# Altium PCB LiPoBattery.PcbDoc
Units mil, origin at the board's own origin, x right, y up, seen from the top; angles counter-clockwise.
Board outline 2340 x 2480 mil, 2 copper layers (Top Layer, Bottom Layer); 22 components, 10 nets, 59 pads, 11 vias.
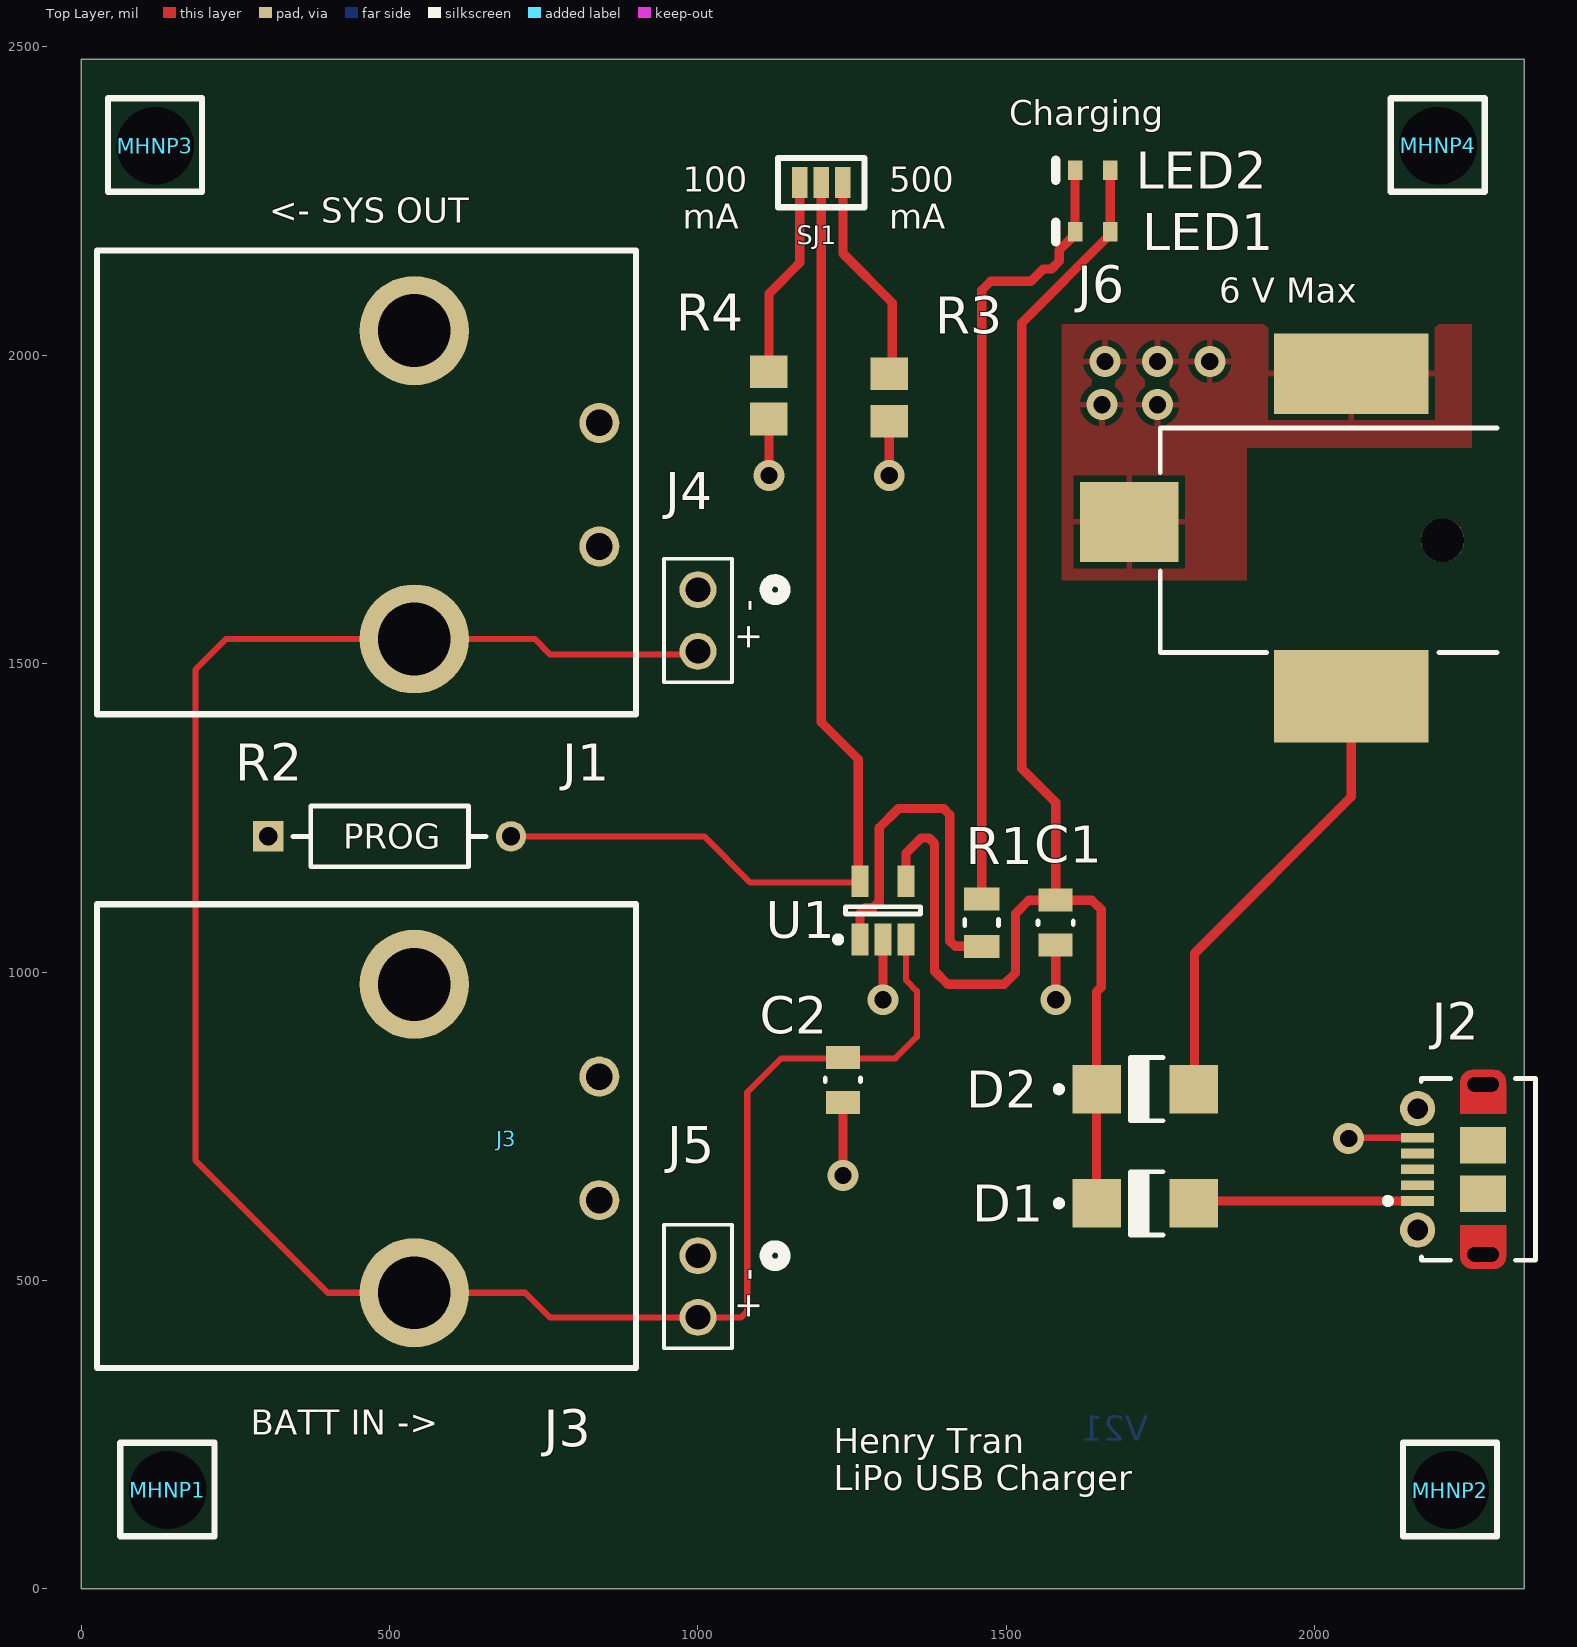
[diagram p0: Top Layer view]
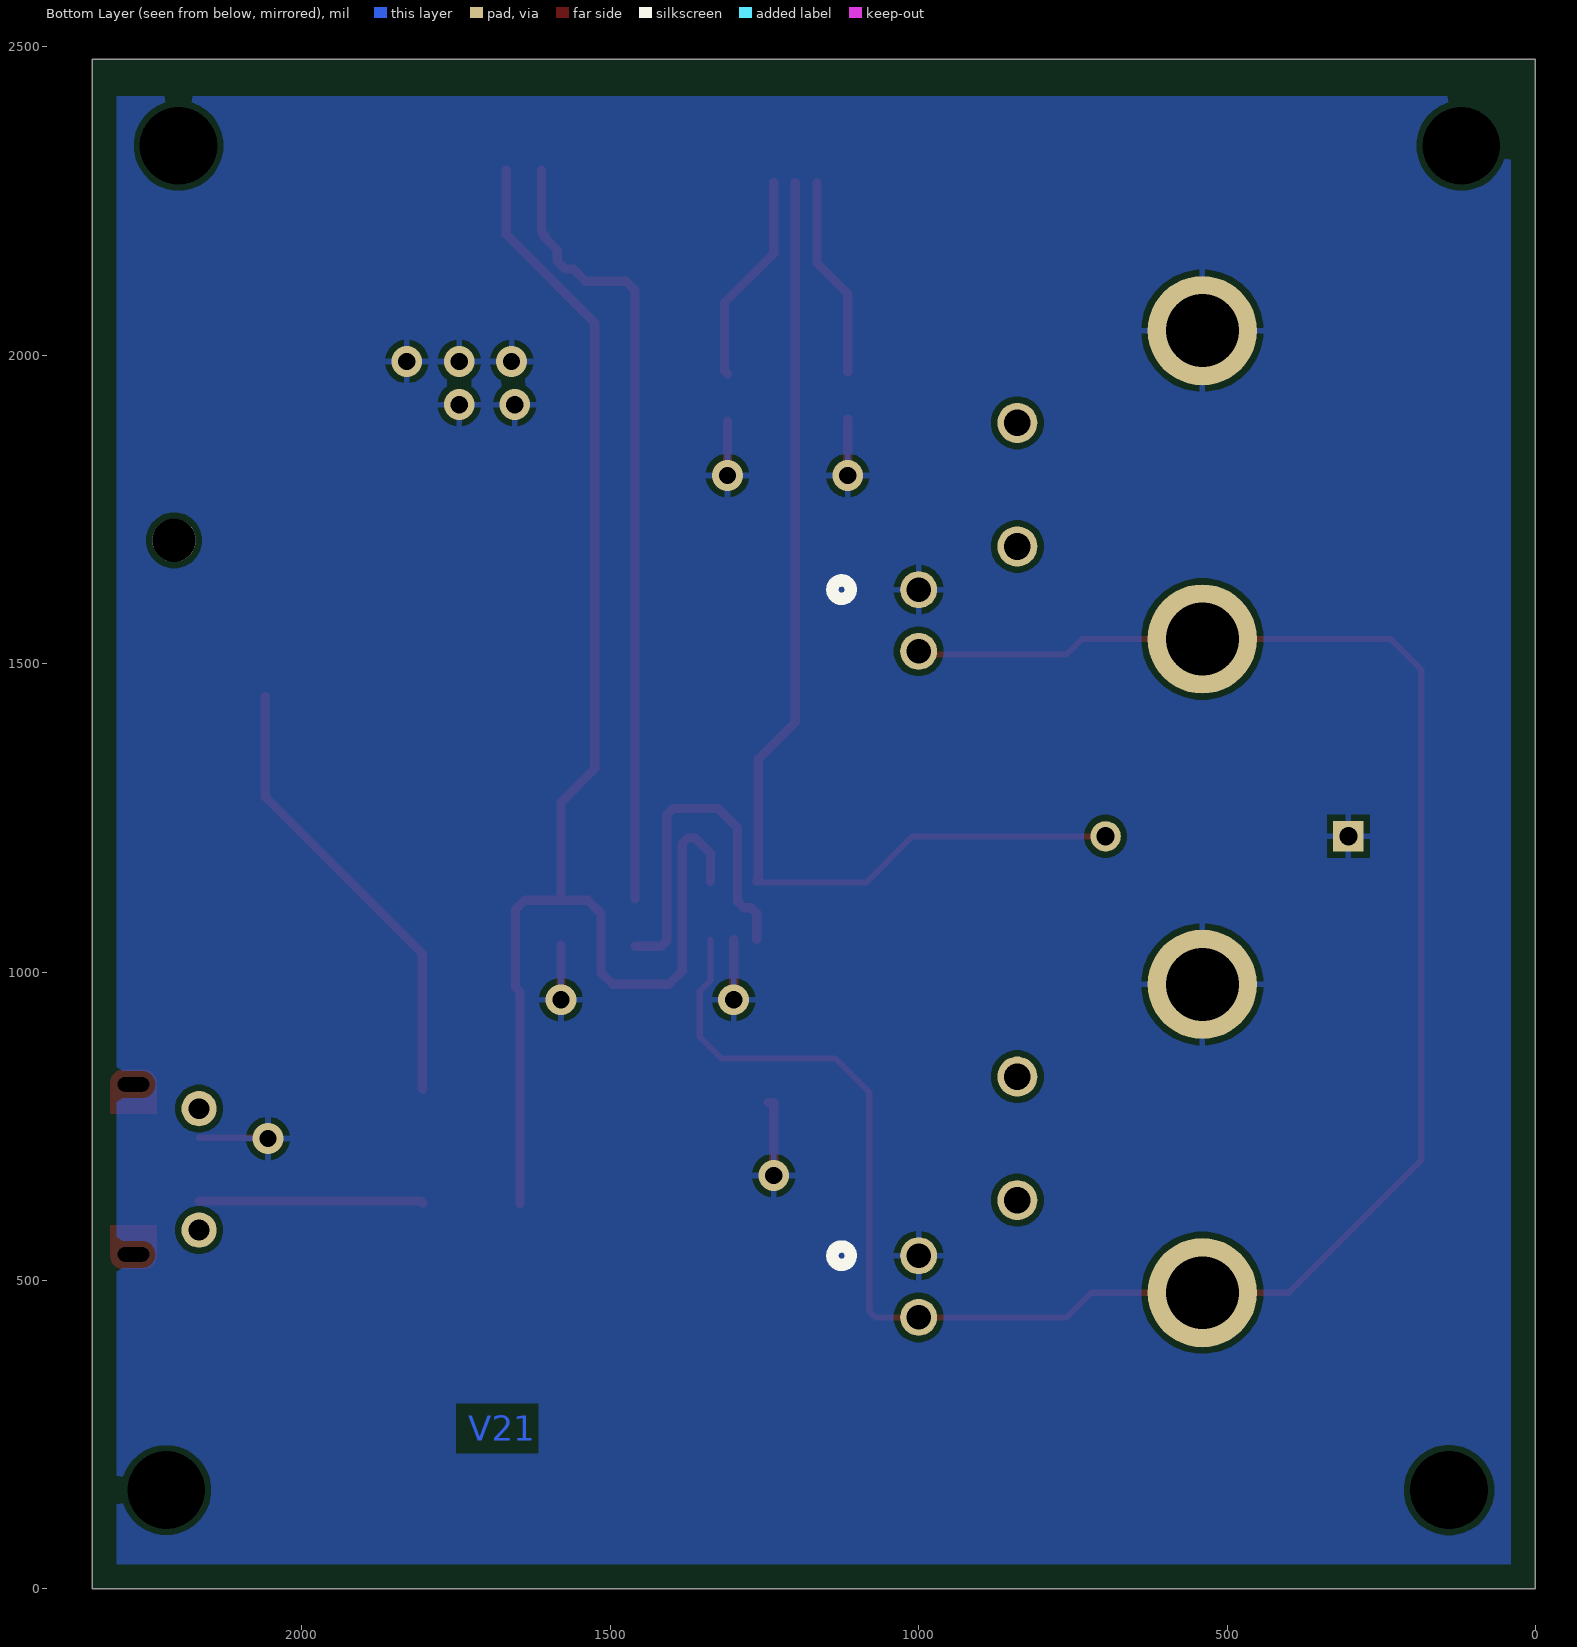
[diagram p1: Bottom Layer view, seen from below]

## Layer stack, top to bottom
Top Solder: solder mask 0.4, Solder Resist, Dk 3.5
Top Layer: signal copper 1.4
Dielectric 1: dielectric 12.6, FR-4, Dk 4.8
Bottom Layer: signal copper 1.4
Bottom Solder: solder mask 0.4, Solder Resist, Dk 3.5

## Board outline
0,740 0,2480 2340,2480 2340,0 0,0

## Design rules (kind name [scope] priority, off if disabled: settings)
Clearance [All] p1: gap=10 ignorepadtopadclearanceinfootprint=TRUE
PolygonConnect [All] p1: connectstyle=Relief reliefconductorwidth=10 reliefentries=4 polygonreliefangle="90 Angle" airgapwidth=10
RoutingVias [All] p1: holewidth=28 width=50 viastyle="Through Hole" minholewidth=28 minwidth=50 maxholewidth=28 maxwidth=50
SolderMaskExpansion [All] p1: expansion=4 istentingtop=FALSE
SupplyNets "Schematic Supply Nets" [InNet('GND')] p1: voltage=0.000
Width [All] p1: maxlimit=40 minlimit=10 preferedwidth=10
30 further rules are at their usual default settings.

## Components (designator, comment, footprint, x,y, rotation, side; value= is the part's Value field where it differs from the comment)
C1 "4.7uF" FP-CC0805-0_85-MFG 1580,1080 r270 top value="4.7 uF"
C2 "4.7uF" FP-CC0805-0_85-MFG 1235,825 r270 top value="4.7 uF"
D1 "40V, 1A" ONSC-SMA-2-403D-02_V 1725,625 r0 top
D2 "40V, 1A" ONSC-SMA-2-403D-02_V 1725,810 r0 top
J1 "CONN HEADER R/A 2POS 5.08MM" 1-179276-2 540,2040 r270 top locked
J2 "105017-0001" USB-MICRO-B_V 2220,680 r90 top locked
J3 "CONN HEADER R/A 2POS 5.08MM" 1-179276-2 540,980 r270 top locked
J4 "2 POS VERT HEADER  0.100\"" 2Pins_AMP 1000,1620 r180 top
J5 "2 POS VERT HEADER  0.100\"" 2Pins_AMP 1000,540 r180 top
J6 "CONN PWR JACK 2.1X5.5MM SOLDER" FP-RASM722PTR13X-MFG 2040,1700 r90 top locked
LED1 "RED" VISH-TLMS1000_V 1640,2200 r180 top
LED2 "RED" VISH-TLMS1000_V 1640,2300 r180 top
MHNP1 "Mounting Hole Non-Plated 3.2mm" MTHNP3P2MM 140,160 r90 top
MHNP2 "Mounting Hole Non-Plated 3.2mm" MTHNP3P2MM 2220,160 r90 top
MHNP3 "Mounting Hole Non-Plated 3.2mm" MTHNP3P2MM 120,2340 r90 top
MHNP4 "Mounting Hole Non-Plated 3.2mm" MTHNP3P2MM 2200,2340 r90 top
R1 "330" FP-CRCW0805-e3-MFG 1460,1080 r270 top
R2 "PROG" FP-MRS25-MFG 500,1220 r0 top
R3 "2k" RESC2013X70X40ML20T20 1310,1931.61 r90 top
R4 "10k" RESC2013X70X40ML20T20 1115,1935 r90 top
SJ1 "SJUMPER3POS" SJUMPER3POS-Footprint-1 1200,2280 r180 top (schematic designator SJ?)
U1 "Charge Management Controller" SOT-23-OT5_M 1300,1100 r90 top

## Footprints (in the part's own frame and the unit in brackets; to place one, negate y for a bottom-side part, rotate by r counter-clockwise, add the part's x,y. Pads: shape width x height; smd on the part's side, far side on the other; paste and mask are expansions set on the pad)
1-179276-2 [mm] "2_POS_HDR_X19MMY22MM"
  round 4.5 hole 3: 1(0,0) 2(12.7,0)
  round 1.65 hole 1.1: 3(8.89,7.62) 4(3.8,7.62)
  silkscreen extent -3.3,-13.08 15.8,9.13, body extent -3.24,-13.65 15.84,8.45, height 10.86
2Pins_AMP [mil]
  round 60 hole 40 paste-99999 mask+0: 1(0,0) 2(0,100)
  silkscreen extent -140,-50 55,150
FP-CC0805-0_85-MFG [mm]
  rect 0.95x1.4 smd paste+0 mask+0: 1(-0.925,0) 2(0.925,0)
  silkscreen extent -0.08,-0.72 0.08,0.72, body extent -1.6,-1.05 1.6,1.05, height 0.25
FP-CRCW0805-e3-MFG [mm]
  rect 0.95x1.45 smd paste+0 mask+0: 1(-0.975,0) 2(0.975,0)
  silkscreen extent -0.13,-0.7 0.13,0.7, body extent -1.55,-0.82 1.55,0.82, height 0.25
FP-MRS25-MFG [mm]
  rect 1.25x1.25 hole 0.75 paste-2539.97 mask+0: 1(-5,0)
  round 1.25 hole 0.75 paste-2539.97 mask+0: 2(5,0)
  silkscreen extent -3.98,-1.25 3.98,1.25, body extent -5.72,-1.35 5.72,1.35, height 0.25
FP-RASM722PTR13X-MFG [mm]
  rect 3.3x4.06 smd paste+0 mask+0: 1(0.76,8.65)
  rect 3.81x6.35 smd paste+0 mask+0: 2(-6.43,-0.49)
  rect 3.3x6.35 smd paste+0 mask+0: 3(6.86,-0.49)
  round 1.78 hole 1.78 unplated paste-2539.97 mask+0: ""(0,-4.25)
  silkscreen extent -4.63,-6.5 4.63,7.38, body extent -8.43,-7.48 8.61,10.78, height 0.25
MTHNP3P2MM [mm] "Mouting Hole Non-Plated, 3.2 mm hole"
  round 1 hole 3.2: ""(0,0)
  silkscreen extent -1.9,-1.92 1.95,1.95
ONSC-SMA-2-403D-02_V [mm] "Molded, 2-Leads, Body 4.57x2.92mm"
  rect 2x2 smd: 1(-2,0) 2(2,0)
  silkscreen extent -3.67,-1.3 0.74,1.3, body extent -2.16,-1.3 2.16,1.3, height 2.2
RESC2013X70X40ML20T20 [mm] "Chip Resistor, 2-Leads, Body 2.00x1.25mm, IPC Low Density"
  rect 1.35x1.55 smd: 1(-0.975,0) 2(0.975,0)
  body extent -1.1,-0.72 1.1,0.72, height 0.7
SJUMPER3POS-Footprint-1 [mil]
  rect 25x50 smd: 1(-35,0) 2(0,0) 3(35,0)
  silkscreen extent -70,-40 70,40
SOT-23-OT5_M [mm] "SOT23, 5-Leads, Body 2.9x1.7mm, Pitch 0.95mm, Lead Span 2.8mm, IPC Low Density"
  rect 1.3x0.7 smd: 1(-1.2,0.95) 2(-1.2,0) 3(-1.2,-0.95) 4(1.2,-0.95) 5(1.2,0.95)
  silkscreen extent -1.32,-1.55 0.15,1.97, body extent -0.9,-1.55 0.9,1.55, height 1.45
USB-MICRO-B_V [mm] "USB, MICRO B, Body 7.491x4.695 mm, Pitch 0.65 mm"
  rect 0.4x1.35 smd: 1(-1.3,1.35) 2(-0.65,1.35) 3(0,1.35) 4(0.65,1.35) 5(1.3,1.35)
  round 1.45 hole 0.85: 6(-2.5,1.35) 7(2.5,1.35)
  rrect50% 0x0 hole 0.6 slot 1.3 at 90 deg: 8(-3.5,-1.35) 11(3.5,-1.35)
  rect 1.5x1.9 smd: 9(-1,-1.35) 10(1,-1.35)
  Top Layer circle w0.5: c-3.6,-1.8 r0.25
  Top Layer circle w0.5: c-3.6,-0.9 r0.25
  Top Layer circle w0.5: c3.6,-1.8 r0.25
  Top Layer circle w0.5: c3.6,-0.9 r0.25
  Top Layer region: -3.6,-1.8 -3.6,-0.9 -4.1,-0.9 -4.1,-1.8
  Top Layer region: 3.6,-0.9 3.6,-1.8 4.1,-1.8 4.1,-0.9
  Top Layer region: 2.3,-0.4 2.3,-2.3 3.6,-2.3 3.6,-0.4
  Top Layer region: -2.3,-2.3 -2.3,-0.4 -3.6,-0.4 -3.6,-2.3
  silkscreen extent -3.75,-3.5 3.75,2.7, body extent -4.1,-3.9 4.1,1.5, height 2.67
VISH-TLMS1000_V [mm] "SMD, 2-Leads, Body 0.8x1.6mm"
  rect 0.6x0.8 smd: 1(-0.725,0) 2(0.725,0)
  silkscreen extent 1.52,-0.4 1.52,0.4, body extent -0.8,-0.4 0.8,0.4, height 0.65

## Part data
C1 C2: library part CMP-03422-001352-1, "CAP CER 4.7UF 6.3V X5R 0805", Capacitance="4.7 uF", Manufacturer=Yageo, Manufacturer Part Number=CC0805KRX5R5BB475, Package=CC0805-0.85, Temperature="-30°C to +85°C", Temperature Characteristic=X5R, Temperature Range High=+85°C, Temperature Range Low=-30°C, Tolerance=0.1, Voltage Rating="6.3 V", Automotive=No, Category=Cap, ComponentLink2Description=Datasheet, ComponentLink2URL=http://www.yageo.com/documents/recent/UPY-GPHC_Y5V_6.3V-to-50V_8.pdf, Device Class L1="Passive Components", Device Class L2=Capacitors, Device Class L3="Ceramic Capacitors", Digikey Description="CAP CER 4.7UF 6.3V X5R 0805", Footprint Url=http://www.yageo.com/exep/pages/download/literatures/UPY-C_GEN_24.pdf, Height=0.95mm, Ipc Land Pattern Name=CAPC200125X85, Lead Free=Yes, Material=Ceramic, Mouser Description="Multilayer Ceramic Capacitors MLCC - SMD/SMT 4.7uF 6.3V X5R 10%", Octopart=https://octopart.com/cc0805krx5r5bb475-yageo-12885121, RoHS=TRUE
D1 D2: library part CMP-1055-00320-1, "Schottky Power Rectifier, 2-Pin SMA, Pb-Free, Tape and Reel", Manufacturer="On Semiconductor", PartNumber=MBRA140T3G, ComponentLink1Description="Manufacturer URL", ComponentLink1URL=http://www.onsemi.com/, ComponentLink2Description=Datasheet, ComponentLink2URL=http://www.onsemi.cn/pub_link/Collateral/MBRA140T3-D.PDF, ComponentLink3Description="Package Specification", ComponentLink3URL=http://www.onsemi.com/pub_link/Collateral/403D-02.PDF, Configuration=Single, DatasheetVersion="Rev. 10", IFSM Max (A)=30, Mounting Technology="Surface Mount", PackageDescription="2-Pin Small Molded Package, J-Bend Lead, Body 2.605 x 4.315 mm", PackageReference=SMA-2-403D-02, PackageVersion="Rev. G, 07/2012", Packing="Tape and Reel", RoHS=TRUE
J1 J3: library part 1-179276-2, "Connector Header Through Hole, Right Angle 2 position 0.200\" (5.08mm)", Manufacturer="TE Connectivity AMP Connectors", Supplier Part Number 1=A29545-ND, ComponentLink1Description="Product URL", ComponentLink1URL=https://www.te.com/en/product-1-179276-2.html, Manufacturer Part Number=1-179276-2, Supplier 1=Digikey
J2: library part CMP-2000-05827-1, "Micro-USB B Receptacle, Right Angle, Bottom Mount, Surface Mount, with Solder Tabs, -30 to 85 degC, 5-Pin USB, RoHS, Tape and Reel", Manufacturer=Molex, Package Description="5-Leads USB, Micro B, Body 7.5 x 5 mm, Pitch 0.65 mm", Package Reference=MICRO-B, Package Version="Rev. F, 12/2012", Standard Package=1, Voltage - Max=30V, 3D Model=105017-0001.stp, Catalog Drawings=1050170001, Category=Connectors,Interconnects, Circuits=5, Connector Type=USB-microB, Datasheet URL=http://www.molex.com/elqNow/elqRedir.htm?ref=http://www.molex.com/webdocs/datasheets/pdf/en-us/1050170001_IO_CONNECTORS.pdf, Datasheet Version=03/2016, Family=USB,DVI,HDMIConnectors, Featured Product=Micro-USBConnectorsUSBConnectors, Features=Shielded,SolderRetention, Gender=Receptacle, Ingress Protection=-, Manufacturer URL=http://www.molex.com/, Mating Products=WM17145-ND-CABLEMICROUSBBTOSTDA1.0MWM17147-ND-CABLEMICROUSBBTOSTDA2.0MWM17146-ND-CABLEMICROUSBBTOSTDA1.5M, Mounting Technology=SurfaceMount, Mounting Type=BoardCutout,SurfaceMount,RightAngle, Number of Contacts=5, Online Catalog=Molex-MicroUSB, Other Names=WM1399DKR, Package URL=http://www.molex.com/pdm_docs/sd/1050170001_sd.pdf, Packaging=Digi-Reel®, PCN Assembly/Origin=ResinSupplier21/Oct/2015, RoHS Information=1050170001CertofCompliance, Series=-, Specifications=-
J4 J5: library part 67997-402HLF, "Connector Header Through Hole 2 position", Mfr_Name="Amphenol ICC", RefDes=RefDes, Supplier 1="Arrow Electronics", Supplier Part Number 1=67997-402HLF, Type=Type
J6: library part CMP-47995-000002-1, Case/Package=SMD/SMT, Color=Black, Current Rating=5A, Package Quantity=120, Connector Type=Jack, Contact Material="Copper Alloy", Contact Plating=Tin, Gender=Male, Housing Color=Black, Housing Material=Thermoplastic, Mount="Surface Mount", Shielding=Unshielded, Termination=Solder
LED1 LED2: library part CMP-2000-07254-1, "Low Current LED, 40 mW, 1.8 V, -40 to 100 degC, 2-Pin SMD (0603), RoHS, Tape and Reel", Forward Current If=2mA, Forward Voltage=1.8V, LED Colour=Red, Manufacturer=Vishay, Package Description="2-Pin Surface Mount Device, Body 1.6 x 0.8 mm", Package Reference=TLMS1000, Automotive Qualification Standard=AEC-Q100, Bulb Size=1.6mmx0.8mm, Datasheet URL=https://datasheet.ciiva.com/5798/1698881-5798337.pdf, Datasheet Version="Rev. 1.7, 02/2011", LED Mounting=SMD, Lens Shape=Rectangular, Luminous Intensity=4mcd, Manufacturer URL=http://www.vishay.com/, Mounting Technology=SurfaceMount, MSL=MSL2-1year, Packaging=CutTape, Product Range=-, SVHC=ToBeAdvised, Viewing Angle=80°, Wavelength Typ=636nm
MHNP1 MHNP2 MHNP3 MHNP4: library part MTHNP3P2MM, "Mounting Hole Non-Plated 3.2mm drill hole"
R1: library part CMP-2001-03823-2, "RES Thick Film, 330Ω, 1%, 0.125W, 100ppm/°C, 0805", Case Code (Imperial)=0805, Case Code (Metric)=2012, Max Operating Temperature=155°C, Max Power Dissipation=125mW, Min Operating Temperature=-55°C, Package Quantity=10, Resistance=330R, Temperature Coefficient=100ppm/°C, Tolerance=1%, Voltage Rating=150V, Case/Package=0805, Composition="Thick Film", Contact Plating=Tin, Depth=1.25mm, Features="Automotive AEC-Q200", Height=0.02inch, Lead Free="Lead Free", Length=2mm, Military Standard=Not, Mount="Surface Mount", Number of Terminations=2, Packaging="Tape and Reel", Power Rating=125mW, Termination=SMD/SMT, Voltage Rating (DC)=150V, Weight=0.000194oz, Width=0.049inch
R2: library part CMP-00030-42757237-1, "MRS25000C1000FRP00 Resistor, 100 Ohm, ± 1%, 600 mW, Axial Leaded, Metal Film (Thin Film), Professional", Case/Package=Axial, Max Operating Temperature=155°C, Max Power Dissipation=600mW, Min Operating Temperature=-55°C, Resistance=100Ω, Temperature Coefficient=50ppm/°C, Tolerance=1%, Voltage Rating=350V, Composition="Metal Film, Thin Film", Contact Plating=Tin, Diameter=2.5mm, Lead Diameter=600µm, Lead Free="Lead Free", Length=6.5mm, Military Standard=Not, Mount="Through Hole", NexarPartId=42757237, Number of Pins=2, Number of Terminations=2, Packaging="Tape & Reel (TR)", Power Rating=600mW, Radiation Hardening=No, REACH SVHC=Unknown, RoHS=Compliant, Schedule B="8533210090, 8533210090", Termination=Axial, Voltage Rating (DC)=350V, Width=2.5mm
R3: library part CMP-2001-00370-1, Manufacturer=Panasonic, Part Number=ERJ-6GEYJ202V
R4: library part CMP-2001-04376-1, Manufacturer=Panasonic, Part Number=ERJ-6ENF1002V
SJ1: library part CMP-00030-00001-3, "Solder jumer 3 pads and pins", Pins=3
U1: library part CMP-0133-00139-1, "Simple, Miniature Single-Cell, Fully Integrated Li-Ion/Li-Polymer Charge Management Controller, 4.2V, 5-Pin SOT-23, Industrial Temperature, Tape and Reel", Code_IPC=SOT23-5, DatasheetVersion="revB, Sep-2007", PackageDescription="5-Lead Plastic Small Outline Transistor (OT) [SOT-23]", PackageReference=SOT-23-OT5, PackageVersion="revBB, Aug-2009"

## Via types
v1: diameter 50, hole 28, Top Layer to Bottom Layer, 11 vias

## Nets (pads, with @x,y where several pads share a name; then routed paths per layer and width w, separated by ;. In a path a pad name is that pad's centre, name@x,y a point inside that pad or via, vN(x,y) a via of type N, cw(c..) or ccw(c..) an arc to the next point about the centre after c; other vN are vias at no path point)
GND: C1.2 C2.2 J1.1 J2.5 J3.1 J4.1 J5.1 J6.1 J6.3 R2.1 R3.1 R4.1 U1.2 | length 606
  Top Layer w10: v1(2055,730) 2056.18,731.18 J2.5
  Top Layer w15: v1(1115,1805) R4.1 ; v1(1235,670) C2.2 C2.2@1243.86,788.58 ; v1(1300,955) U1.2 ; v1(1310,1805) R3.1 ; v1(1580,955) C1.2
  other v1: 1655,1920 1745,1920 1660,1990 1745,1990 1830,1990
NetC1_1: C1.1 D1.1 D2.1 LED1.1 LED2.1 U1.4 | length 2455.5
  Top Layer w15: U1.4 1337.4,1192.4 1362.17,1217.17 1374.6,1217.17 1383.39,1208.39 1383.39,1001.61 1405,980 1496.21,980 1515,998.79 1515,1095 1536.42,1116.42 C1.1 ; D1.1 D2.1 1646.26,967.78 1653.79,975.31 1653.79,1101.21 1638.58,1116.42 C1.1 ; LED2.1 LED1.1 1668.54,2196.06 1525,2052.52 1525,1330 1580,1275 C1.1
NetC2_1: C2.1 J1.2 J3.2 J4.2 J5.2 U1.3 | length 3480.2
  Top Layer w10: J4.2 995,1515 760,1515 735,1540 J1.2 235,1540 185,1490 185,695 400,480 J3.2 720,480 760,440 J5.2 1070,440 1080,450 1080,805 1135,860 1320,860 1355,895 1355,969 1337.4,986.6 U1.3
NetD1_2: D1.2 J2.1 | length 364.7
  Top Layer w15: D1.2 1807.56,628.82 J2.1
NetD2_2: D2.2 J6.2 | length 742.7
  Top Layer w15: D2.2 1805,811.26 1805,1030 2059.29,1284.29 J6.2
NetLED1_2: LED1.2 LED2.2 R1.1 | length 1290.4
  Top Layer w15: R1.1 1460,2105.36 1474.64,2120 1540,2120 1560,2140 1573.19,2140 1585.93,2152.74 1585.93,2170.54 1607.15,2191.75 1607.15,2195.69 LED1.2 LED2.2
NetR1_2: R1.2 U1.1 | length 592.6
  Top Layer w15: U1.1 1262.6,1095.37 1271.39,1104.15 1283.63,1104.15 1293.88,1114.4 1293.88,1233.88 1325,1265 1398.39,1265 1408.39,1255 1408.39,1050.4 1417.17,1041.61 R1.2
NetR2_2: R2.2 SJ1.2 U1.5 | length 1756.4
  Top Layer w10: R2.2 1010,1220 1085,1145 1260.35,1145 U1.5
  Top Layer w15: SJ1.2 1200,1405 1260,1345 1260,1149.84 U1.5
NetR3_2: R3.2 SJ1.1 | length 345.2
  Top Layer w15: SJ1.1 1235,2165 1315,2085 1315,1975 R3.2
NetR4_2: R4.2 SJ1.3 | length 327.3
  Top Layer w15: R4.2 1115,2100 1165,2150 SJ1.3
pads on no net: J1.3 J1.4 J2.2 J2.3 J2.4 J2.6 J2.7 J2.8 J2.9 J2.10 J2.11 J3.3 J3.4 J6. MHNP1. MHNP2. MHNP3. MHNP4.

## Polygon pours and split planes (outlines as drawn)
GND on Top Layer "GND" (solid, pour order 2): 1590,2050 2255,2050 2255,1850 1890,1850 1890,1635 1590,1635
GND on Bottom Layer "GND" (solid, pour order 1): 40,2420 2300,2420 2300,40 40,40

## Other copper
Bottom Layer:
  text "V21" at 1730,240 h40

## Silkscreen, mask and mechanical layers (free items; w line width, h text height)
Top Overlay:
  text "Charging" at 1505,2373.33 h40
  text "<- SYS OUT" at 305,2215 h40
  text "100  / mA" at 975,2205 h40
  text "500  / mA" at 1310,2205 h40
  text "6 V Max" at 1845,2085 h40
  text "+ -" at 1100,1520 h40 r90
  text "PROG" at 425,1200 h40
  text "+ -" at 1100,435 h40 r90
  text "BATT IN ->" at 275,250 h40
  text "Henry Tran / LiPo USB Charger" at 1220,160 h40

## Text inside footprints (layer, text, board x,y; h text height)
J2: Mechanical 1 "PCB EDGE" at 2334.17,396.54 h11.81 r90